# EAGLE board Prototyp-V-0.1 (EAGLE 6.6.0)
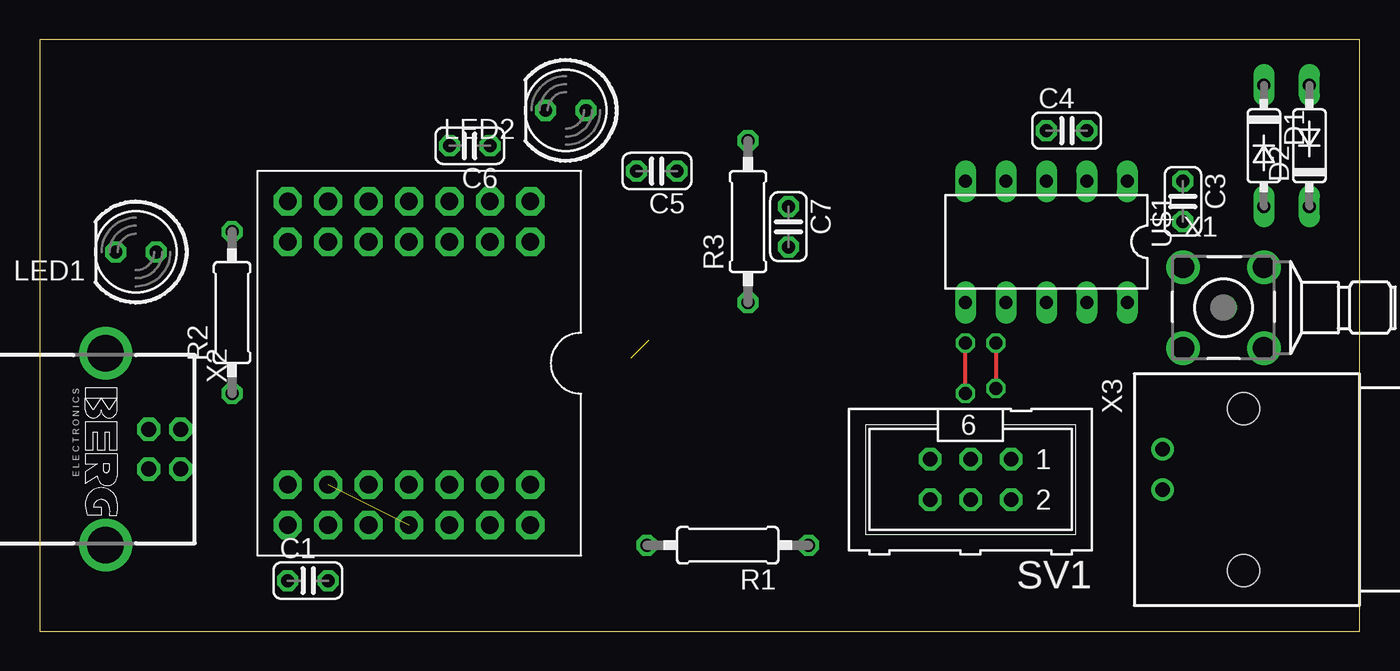
[diagram p0: board, top side]
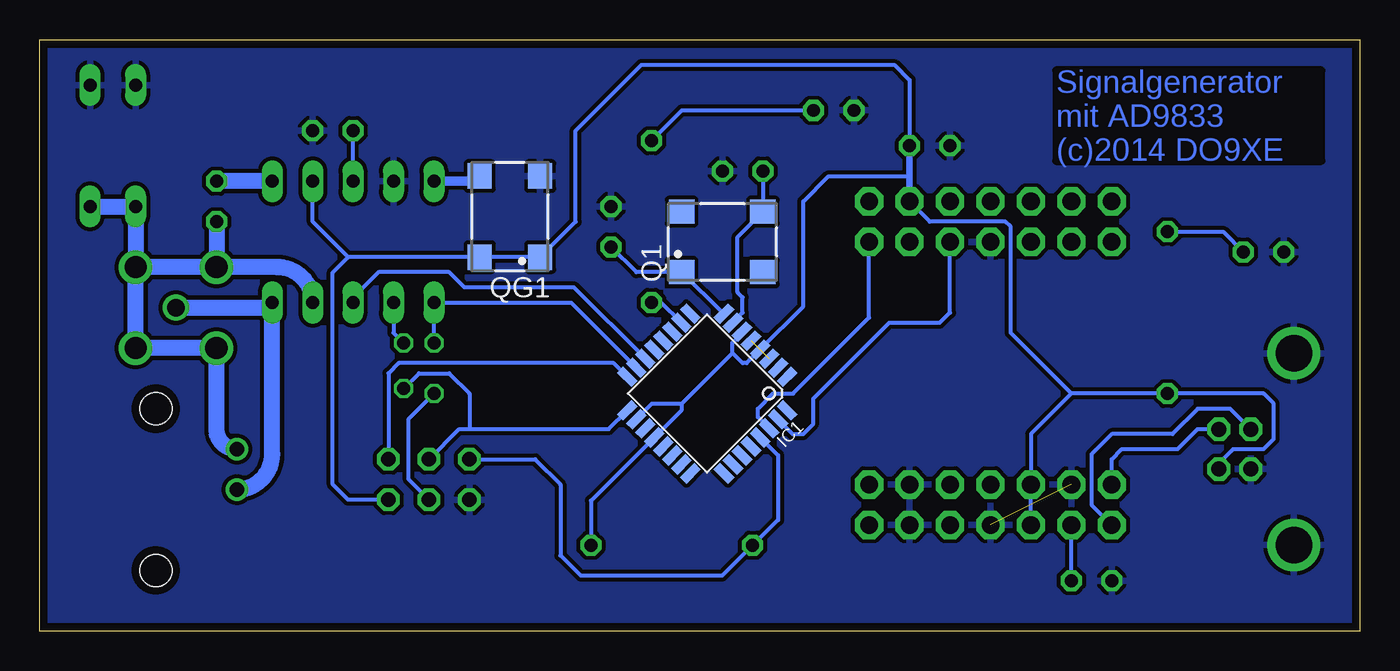
[diagram p1: board, bottom side, seen from below]

Size 82.85 x 37.13 mm. Coordinates in mm from the lower left corner, seen from the top.
Outline: 0,0 82.85,0 82.85,37.13 0,37.13 0,0
Copper layers (1*16): Top 0.035mm / dielectric 1.5mm / Bottom 0.035mm
Design rules "Ätzen": minimum track width 10mil, minimum drill 23mil, track to track 10mil, track to pad 10mil, pad to pad 10mil, via to via 10mil, smd to smd 10mil, copper to edge 20mil, drill to drill 8mil, minimum pad ring 10mil, minimum via ring 8mil, stop-mask expansion 4mil, vias tented up to drill 0mil, thermal gap 10mil

## Footprints (pad centres in the part's own frame; a part is rotated, then mirrored left to right if it is on the bottom)
C025-024X044 = drill 0.813 octagon: 1 -1.27,0; 2 1.27,0
DO35-7 = drill 0.813 long: A 3.81,0; C -3.81,0
TQFP32-08 = smd 1.27 x 0.559: 1 -4.293,2.8; 2 -4.293,2; 3 -4.293,1.2; 4 -4.293,0.4; 5 -4.293,-0.4; 6 -4.293,-1.2; 7 -4.293,-2; 8 -4.293,-2.8; 17 4.293,-2.8; 18 4.293,-2; 19 4.293,-1.2; 20 4.293,-0.4; 21 4.293,0.4; 22 4.293,1.2; 23 4.293,2; 24 4.293,2.8 | smd 0.559 x 1.27: 9 -2.8,-4.293; 10 -2,-4.293; 11 -1.2,-4.293; 12 -0.4,-4.293; 13 0.4,-4.293; 14 1.2,-4.293; 15 2,-4.293; 16 2.8,-4.293; 25 2.8,4.293; 26 2,4.293; 27 1.2,4.293; 28 0.4,4.293; 29 -0.4,4.293; 30 -1.2,4.293; 31 -2,4.293; 32 -2.8,4.293
ADAPTER = drill 1.1 pad 1.778 octagon: P$1 -7.62,7.62; P$2 -10.16,7.62; P$3 -7.62,5.08; P$4 -10.16,5.08; P$5 -7.62,2.54; P$6 -10.16,2.54; P$7 -7.62,0; P$8 -10.16,0; P$9 -7.62,-2.54; P$10 -10.16,-2.54; P$11 -7.62,-5.08; P$12 -10.16,-5.08; P$13 -7.62,-7.62; P$14 -10.16,-7.62; P$15 10.16,-7.62; P$16 7.62,-7.62; P$17 10.16,-5.08; P$18 7.62,-5.08; P$19 10.16,-2.54; P$20 7.62,-2.54; P$21 10.16,0; P$22 7.62,0; P$23 10.16,2.54; P$24 7.62,2.54; P$25 10.16,5.08; P$26 7.62,5.08; P$27 10.16,7.62; P$28 7.62,7.62
LED5MM = drill 0.813 octagon: A -1.27,0; K 1.27,0
SM77H = smd 1.6 x 1.5: 1 -2.55,-1.9; 2 2.55,-1.9; 3 2.55,1.9; 4 -2.55,1.9
0207/10 = drill 0.813 octagon: 1 -5.08,0; 2 5.08,0
ML6 = drill 0.914 octagon: 1 -2.54,-1.27; 2 -2.54,1.27; 3 0,-1.27; 4 0,1.27; 5 2.54,-1.27; 6 2.54,1.27
DIL10 = drill 0.813 long: 1 -5.08,-3.81; 2 -2.54,-3.81; 3 0,-3.81; 4 2.54,-3.81; 5 5.08,-3.81; 6 5.08,3.81; 7 2.54,3.81; 8 0,3.81; 9 -2.54,3.81; 10 -5.08,3.81
BU-SMB-H = drill 1.1: 1 0,0 | drill 1.4: 2 -2.54,2.54; 3 2.54,2.54; 4 2.54,-2.54; 5 -2.54,-2.54
PN61729-S = drill 0.95 octagon: 1 1.25,4.71; 2 -1.25,4.71; 3 -1.25,2.71; 4 1.25,2.71 | drill 2.3 pad 2.9: S1 -6.02,0; S2 6.02,0
AMP_227161 = drill 0.9 pad 1.27: 1 0,-5.08; 2 -2.54,-5.08 | hole 2: -5.08,0; 5.08,0

## Placement (x,y rotation side)
C1  [C025-024X044]  16.83,3.17 0 top
C3  [C025-024X044]  71.75,26.99 270 top
C4  [C025-024X044]  64.45,31.43 0 top
C5  [C025-024X044]  38.73,28.89 180 top
C6  [C025-024X044]  26.99,30.48 180 top
C7  [C025-024X044]  46.99,25.4 270 top
D1  1N4148DO35-7  [DO35-7]  76.83,30.48 270 top
D2  1N4148DO35-7  [DO35-7]  79.69,30.48 90 top
IC1  MEGA8-AI  [TQFP32-08]  40.96,14.92 225 bottom
IC2  FT232RA  [ADAPTER]  23.18,16.83 270 top
LED1  [LED5MM]  6.03,23.81 180 top
LED2  [LED5MM]  33.02,32.7 180 top
Q1  [SM77H]  40.01,24.45 0 bottom
QG1  SM77H  [SM77H]  53.34,26.04 90 bottom
R1  [0207/10]  43.18,5.4 180 top
R2  [0207/10]  12.06,20 90 top
R3  [0207/10]  44.45,25.72 90 top
SV1  [ML6]  58.42,9.53 180 top
U$1  AD9833-P  [DIL10]  63.18,24.45 180 top
X1  BU-SMB-H  [BU-SMB-H]  74.3,20.32 0 top
X2  PN61729-S  [PN61729-S]  4.13,11.43 270 top
X3  1-227161-2  [AMP_227161]  75.56,8.89 270 top

## Library data of the parts
C1 C3-C7 R1-R3 = rcl
D1 D2 = diode
IC1 = atmel; MPN: ATMEGA8-16AU; OC_FARNELL: 9171371; OC_NEWARK: 73M8863
IC2 = FT232
LED1 LED2 = led
Q1 = crystal
QG1 = crystal; OC_FARNELL: unknown; OC_NEWARK: unknown
SV1 = con-harting-ml; OC_FARNELL: unknown; OC_NEWARK: unknown
U$1 = analog-devices
X1 X3 = con-coax; OC_FARNELL: unknown; OC_NEWARK: unknown
X2 = con-berg; OC_FARNELL: unknown; OC_NEWARK: unknown

## Nets
AGND: C3.2 D1.A D2.C U$1.9 X1.2 X1.3 X1.4 X1.5 X3.2
AOUT: U$1.10 X1.1 X3.1
DGND: C1.1 C4.2 C5.1 C6.2 C7.1 D1.C D2.A IC1.3 IC1.5 IC1.21 IC2.P$7 IC2.P$18 IC2.P$21 IC2.P$25 IC2.P$26 LED1.K LED2.K QG1.2 SV1.6 U$1.4 X2.4 X2.S1 X2.S2
N$1: C5.2 IC1.7 Q1.3
N$2: C7.2 IC1.8 Q1.1
N$3: C3.1 U$1.1
N$4: IC1.17 SV1.3 U$1.7
N$5: IC1.29 R1.2 SV1.5
N$6: IC1.15 SV1.4 U$1.6
N$7: IC1.14 U$1.8
N$8: IC1.16 SV1.1
N$9: C4.1 U$1.3
N$10: IC1.10 R3.1
N$11: QG1.3 U$1.5
N$12: C1.2 IC2.P$17
N$13: IC1.30 IC2.P$1
N$14: IC1.31 IC2.P$5
N$15: IC2.P$16 X2.2
N$16: IC2.P$15 X2.3
N$17: LED1.A R2.2
N$18: LED2.A R3.2
VCC: C6.1 IC1.4 IC1.6 IC1.18 IC1.20 IC2.P$4 IC2.P$19 IC2.P$20 QG1.1 QG1.4 R1.1 R2.1 SV1.2 U$1.2 X2.1

## Tracks (layer width: path | path; a pad name or v marks a point on that pad's centre or on a via)
AGND
  Bottom 1.016: X1.2 X1.3 | X1.3 X1.4 X1.5 71.75,12.7 arc-90 X3.2 | D2.C D1.A X1.3 | C3.2 X1.2 | U$1.9 arc-90 67.94,22.86 X1.2
AOUT
  Bottom 1.016: X1.1 68.58,20.32 U$1.10 68.26,11.11 arc90 X3.1
DGND  (2 unrouted)
  pour Bottom (isolate 0.254): 0,0 84.77,0 84.77,37.15 0,37.15
N$1
  Bottom 0.254: C5.2 Q1.3 39.05,24.75 39.05,21.27 38.73,20.95 38.73,20 39.34,19.4 IC1.7
N$2
  Bottom 0.254: IC1.8 39.95,19.94 Q1.1 45.41,22.55 C7.2
N$3
  Bottom 1.016: U$1.1 C3.1
N$4  (via drill 0.8)
  Top 0.254: v60.01,18.1 v60.01,15.24
  Bottom 0.254: SV1.3 56.52,12.7 55.88,12.7 | 55.88,12.7 47.14,12.7 IC1.17 | U$1.7 60.64,18.73 v60.01,18.1 | v60.01,15.24 59.05,16.19 57.15,16.19 55.88,14.92 55.88,12.7
N$5
  Bottom 0.254: IC1.29 36.51,11.04 36.51,6.99 R1.2 40.01,3.49 48.9,3.49 50.16,4.76 50.16,9.21 51.75,10.79 SV1.5
N$6  (via drill 0.8)
  Top 0.254: v58.1,14.92 v58.1,18.1
  Bottom 0.254: IC1.15 49.5,20.64 U$1.6 v58.1,18.1 | SV1.4 59.69,9.53 59.69,13.34 v58.1,14.92
N$7
  Bottom 0.254: IC1.14 49.32,21.59 56.2,21.59 57.15,22.54 61.59,22.54 63.18,20.95 U$1.8
N$8
  Bottom 0.254: IC1.16 46.82,16.83 60.33,16.83 60.96,16.19 SV1.1
N$9
  Bottom 0.254: U$1.3 C4.1
N$10
  Bottom 0.254: IC1.10 43.84,20.64 R3.1
N$11
  Bottom 0.61: QG1.3 55.23,28.27 U$1.5
N$12
  Bottom 0.254: C1.2 IC2.P$17
N$13
  Bottom 0.254: IC1.30 37.78,13.45 37.78,13.97 36.83,14.92 35.56,14.92 30.8,19.68 IC2.P$1
N$14
  Bottom 0.254: IC1.31 35.59,12.38 34.92,12.38 34.29,13.02 34.29,14.61 29.53,19.37 26.35,19.37 25.72,20 IC2.P$5
N$15
  Bottom 0.254: IC2.P$16 15.56,10.79 14.92,11.43 11.43,11.43 10.16,12.7 8.86,12.7 X2.2
N$16
  Bottom 0.254: X2.3 8.13,13.97 10.16,13.97 11.75,12.38 15.56,12.38 16.83,11.11 16.83,7.94 IC2.P$15
N$17
  Bottom 0.254: R2.2 8.57,25.08 LED1.A
N$18
  Bottom 0.254: R3.2 42.55,32.7 LED2.A
VCC
  Bottom 0.254: 28.26,28.57 33.34,28.57 34.92,26.99 34.92,20.39 IC1.4 38.49,16.83 38.73,16.83 39.37,17.46 | 39.37,17.46 39.37,18.1 38.77,18.7 IC1.6 | IC1.18 44.42,14.29 42.55,14.29 | 42.55,14.29 39.37,17.46 | 42.55,14.29 42.55,13.9 IC1.20 48.26,8.19 R1.1 | 63.49,23.48 QG1.4 QG1.1 49.21,25.71 49.21,31.43 45.09,35.56 29.21,35.56 28.26,34.61 C6.1 | 63.49,23.48 65.72,25.72 U$1.2 | X2.1 8.84,10.53 7.94,11.43 6.03,11.43 5.4,12.06 5.4,14.29 6.03,14.92 R2.1 18.1,14.92 | 18.1,14.92 20.64,12.38 IC2.P$20 IC2.P$19 | SV1.2 63.5,8.26 64.45,9.21 64.45,22.52 63.49,23.48 | 18.1,14.92 21.91,18.73 21.91,25.4 22.23,25.72 26.99,25.72 IC2.P$4
  Bottom 0.406: IC2.P$4 28.26,28.57 C6.1

## Text on the board
Bottom: Signalgenerator / mit AD9833 / (c)2014 DO9XE